# Altium PCB 小车二次制作，嘉立创版.PcbDoc
Units mm, origin at the board's own origin, x right, y up, seen from the top; angles counter-clockwise.
Board outline 100 x 80 mm, 2 copper layers (Top Layer, Bottom Layer); 13 components, 28 nets, 105 pads, 10 vias.
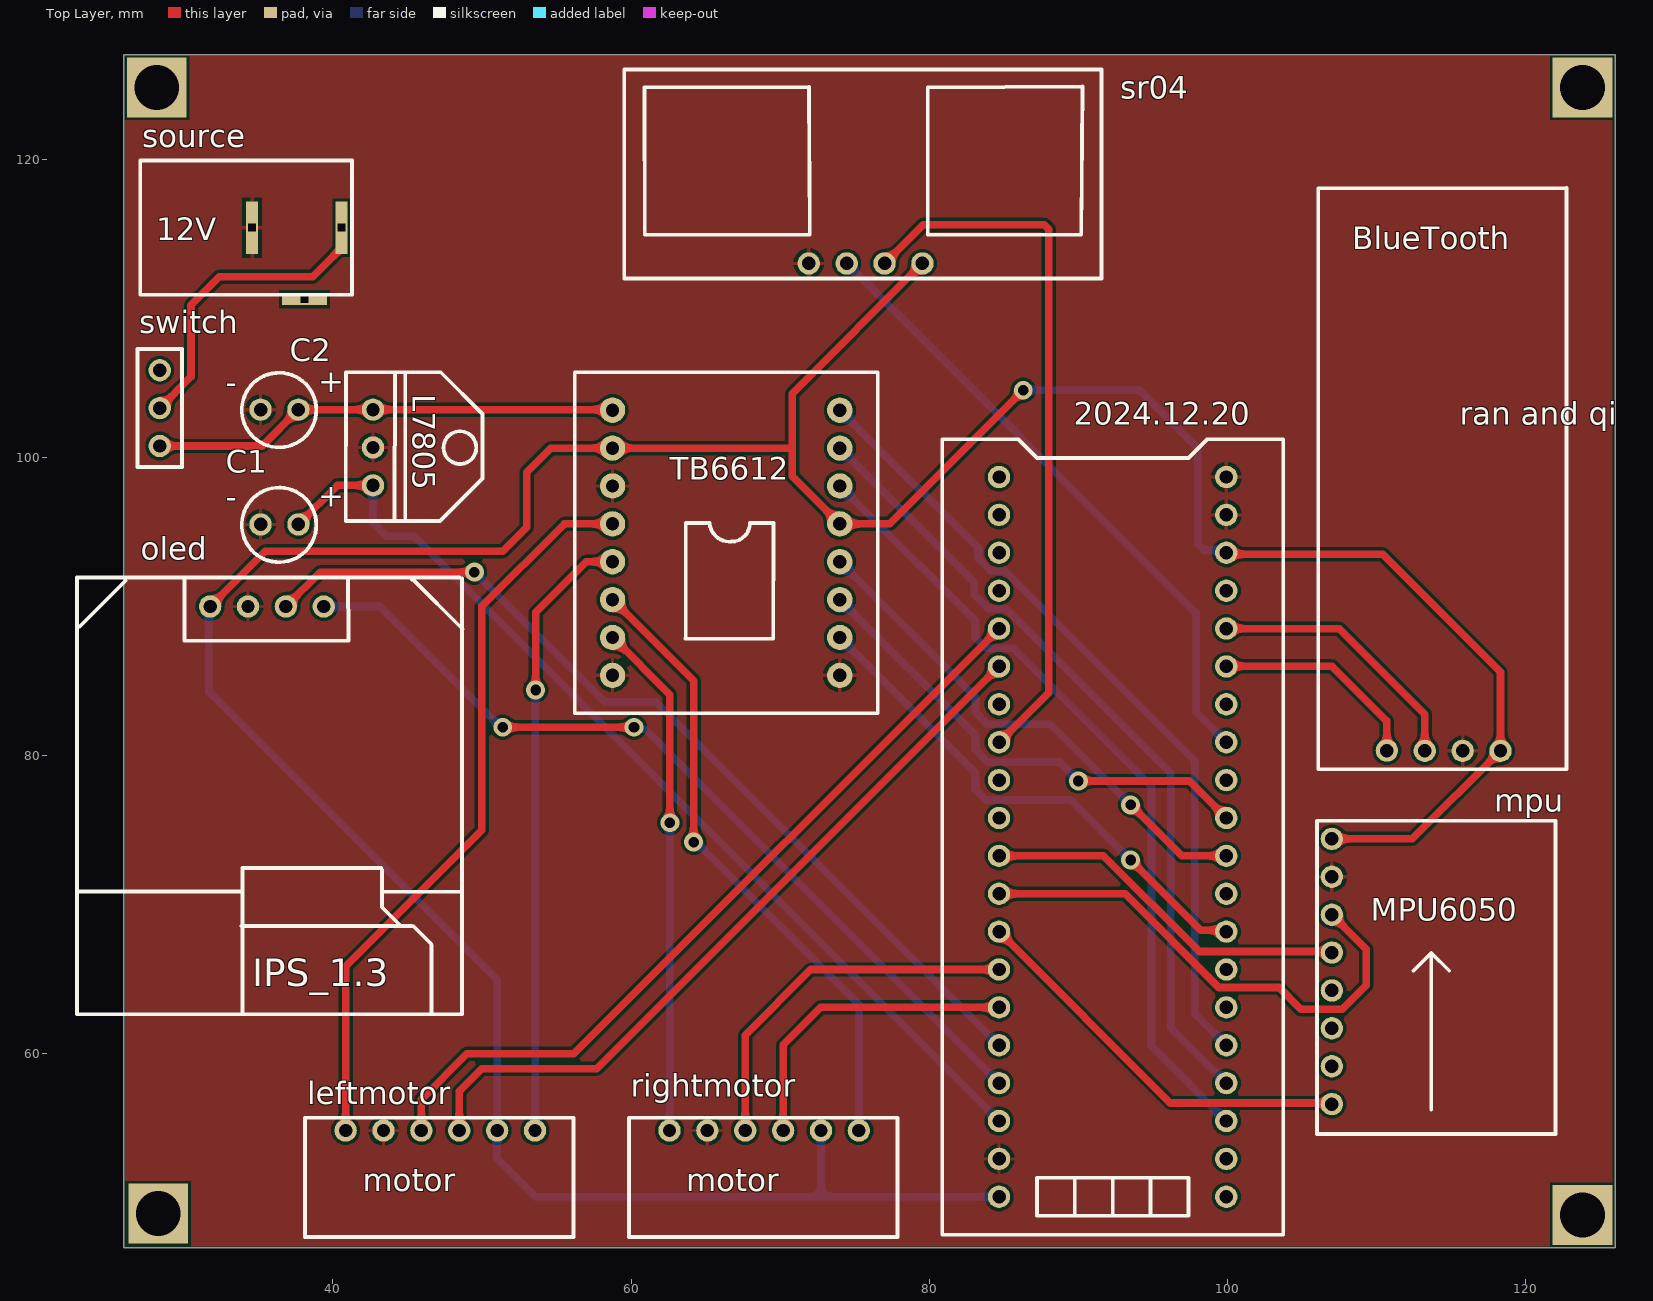
[diagram p0: Top Layer view]
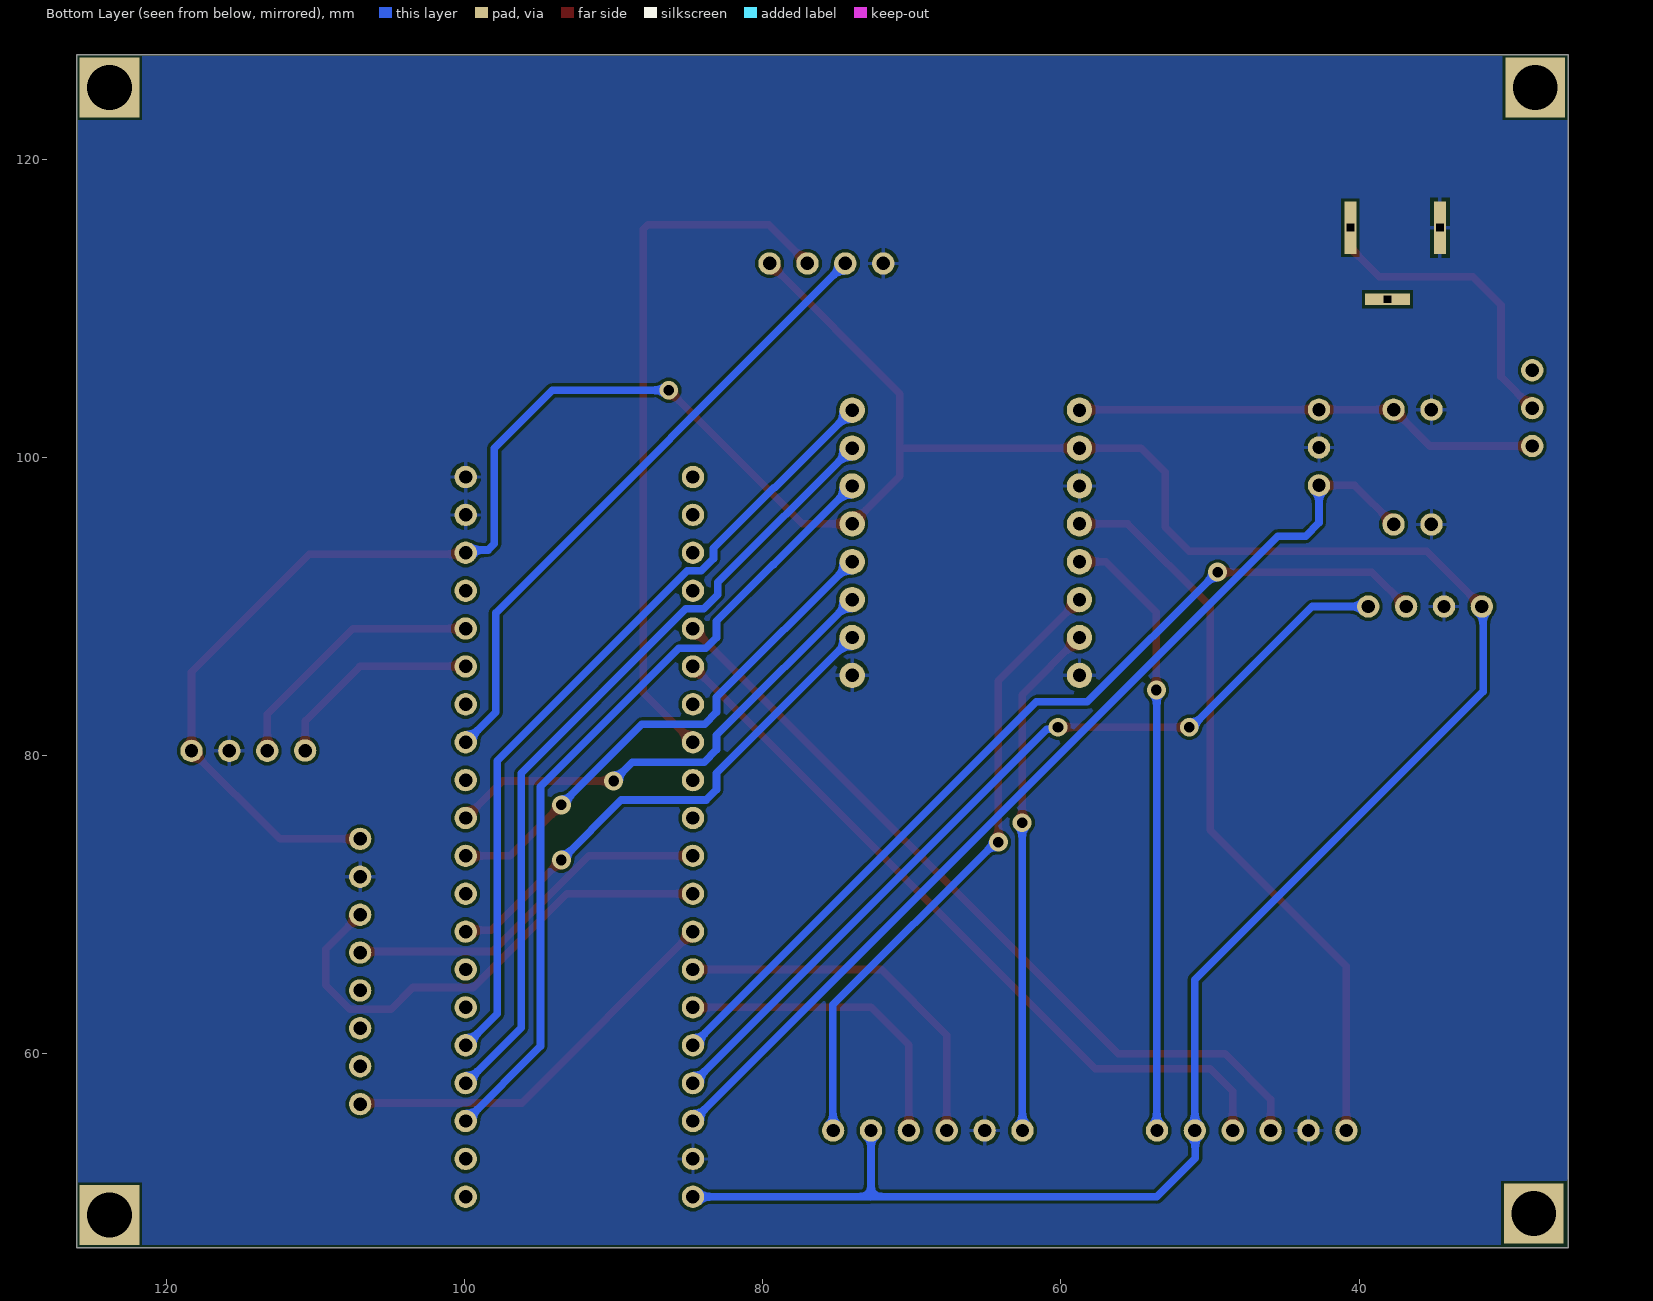
[diagram p1: Bottom Layer view, seen from below]

## Layer stack, top to bottom
Top Solder: solder mask 0.0102, Solder Resist, Dk 3.5
Top Layer: signal copper 0.0356
Dielectric 1: dielectric 0.32, FR-4, Dk 4.8
Bottom Layer: signal copper 0.0356
Bottom Solder: solder mask 0.0102, Solder Resist, Dk 3.5

## Board outline
26,47 126,47 126,127 26,127
cut-out: 0,0 0.254,0 0.254,0.254 0,0.254

## Design rules (kind name [scope] priority, off if disabled: settings)
Clearance [All] p1: gap=0.203 ignorepadtopadclearanceinfootprint=FALSE
PolygonConnect [All] p1: connectstyle=Relief reliefconductorwidth=0.254 reliefentries=4 polygonreliefangle="90 Angle" airgapwidth=0.254
RoutingVias [All] p1: holewidth=0.711 width=1.27 viastyle="Through Hole" minholewidth=0.711 minwidth=1.27 maxholewidth=0.711 maxwidth=1.27
SolderMaskExpansion [All] p1: expansion=0.102 istentingtop=FALSE
Width [All] p1: maxlimit=0.762 minlimit=0.508 preferedwidth=0.635 minimp=50.000000 maximp=50.000000 favimp=50.000000
30 further rules are at their usual default settings.

## Classes and differential pairs
component class Sheet1: left leftmotor mpu oled right rightmotor source switch tb

## Components (designator, comment, footprint, x,y, rotation, side; value= is the part's Value field where it differs from the comment)
* "T6612FNG" TB6612 89.24,70.14 r0 top
Bluetooth "HC-06" blue_tooth 114,97 r0 top
C1 "C_10uF" C_10uF 37.2,92.96 r0 top
C2 "C_10uF" C_10uF 37.2,100.66 r0 top
l7805 "L7805" L7805 41.55,100.02 r270 top
leftmotor "2.0转2.54 6pin" 2.0转2.54 45.942,52.324 r0 top
mpu "陀螺仪" 陀螺仪 113.662,64.474 r90 top
oled "1.3 OLED" "1.3 OLED" 115.07,113.65 r270 top
rightmotor "2.0转2.54 6pin" 2.0转2.54 67.659,52.324 r0 top
source "source" 12V电源 30.4,109.9 r0 top
sr04 "HC-SR04" 超声波 79.54,113 r180 top
switch "switch" switch 25.9,100.86 r270 top
U1 "STM32F103C8T6_minimum_system_board" STM32F103C8T6_minimum_system_board 92.297,78.359 r0 top

## Footprints (in the part's own frame and the unit in brackets; to place one, negate y for a bottom-side part, rotate by r counter-clockwise, add the part's x,y. Pads: shape width x height; smd on the part's side, far side on the other; paste and mask are expansions set on the pad)
"1.3 OLED" [mm]
  round 1.5 hole 0.9: 1(23.65,-83.29) 2(23.65,-80.75) 3(23.65,-78.21) 4(23.65,-75.67)
  silkscreen extent 21.7,-92.24 50.99,-66.36
2.0转2.54 [mm]
  round 1.5 hole 0.9: 1(-5.08,2.54) 2(-2.54,2.54) 3(0,2.54) 4(2.54,2.54) 5(5.08,2.54) 6(7.62,2.54)
  silkscreen extent -7.8,-4.6 10.2,3.4
12V电源 [mm]
  rect 0.8x3.5 hole 0.5 square: 1(10.2,5.5) 2(4.2,5.5)
  rect 3x0.8 hole 0.5 square: 3(7.7,0.7)
  silkscreen extent -3.3,1 10.9,10
blue_tooth [mm]
  round 1.5 hole 0.9: 1(-3.32,-16.66) 2(-0.78,-16.68) 3(1.76,-16.68) 4(4.3,-16.68)
  silkscreen extent -7.92,-17.92 8.73,21.07
C_10uF [mm]
  round 1.5 hole 0.9: 1(0.5,2.54) 2(-2.04,2.54)
  silkscreen extent -3.3,0.01 1.7,5.01
L7805 [mm]
  round 1.5 hole 0.9: 1(-3.18,1.15) 2(-0.64,1.15) 3(1.9,1.15)
  silkscreen extent -5.68,-0.68 4.29,8.49
STM32F103C8T6_minimum_system_board [mm]
  round 1.5 hole 0.9: 1(7.62,-17.78) 2(7.62,-15.24) 3(7.62,-12.7) 4(7.62,-10.16) 5(7.62,-7.62) 6(7.62,-5.08) 7(7.62,-2.54) 8(7.62,0) 9(-7.62,10.16) 10(-7.62,7.62) 11(-7.62,5.08) 12(-7.62,2.54) 13(-7.62,0) 14(-7.62,-2.54) 15(7.62,2.54) 16(7.62,5.08) 17(-7.62,-5.08) 18(-7.62,-7.62) 19(-7.62,-10.16) 20(-7.62,-12.7) 21(-7.62,-15.24) 22(-7.62,-17.78) 23(-7.62,-20.32) 24(7.62,7.62) 25(7.62,10.16) 26(-7.62,20.32) 27(-7.62,17.78) 28(-7.62,15.24) 29(-7.62,12.7) 30(7.62,-25.4) 31(7.62,-22.86) 32(7.62,-20.32) 33(-7.62,-22.86) 34(-7.62,-27.94) 34(7.62,15.24) 35(-7.62,-25.4) 35(7.62,17.78) 35(7.62,20.32) 36(7.62,-27.94) 37(7.62,12.7)
  silkscreen extent -11.43,-30.48 11.43,22.86
switch [mm]
  round 1.5 hole 0.9: 1(0.1,2.5) 2(-2.44,2.5) 3(-4.98,2.5)
  silkscreen extent -6.4,1 1.5,4
TB6612 [mm]
  round 1.7 hole 0.9: 1(-30.48,33.02) 2(-30.48,30.48) 3(-30.48,27.94) 4(-30.48,25.4) 5(-30.48,22.86) 6(-30.48,20.32) 7(-30.48,17.78) 8(-30.48,15.24) 9(-15.24,33.02) 10(-15.24,30.48) 11(-15.24,27.94) 12(-15.24,25.4) 13(-15.24,22.86) 14(-15.24,20.32) 15(-15.24,17.78) 16(-15.24,15.24)
  silkscreen extent -33.02,12.7 -12.7,35.56
超声波 [mm]
  round 1.5 hole 0.9: 1(0,0) 2(2.54,0) 3(5.08,0) 4(7.62,0)
  silkscreen extent -12,-13 20,1
陀螺仪 [mm]
  round 1.5 hole 0.9: 1(9.94,6.67) 2(7.4,6.67) 3(4.86,6.67) 4(2.32,6.67) 5(-0.22,6.67) 6(-2.76,6.67) 7(-5.3,6.67) 8(-7.84,6.67)
  silkscreen extent -9.84,-8.33 11.16,7.67

## Free pads (board coordinates)
  rect 4x4 hole 3: 1(28.2,124.8) 2(123.8,124.8) 3(28.3,49.3) 4(123.8,49.2)

## Via types
v1: diameter 1.27, hole 0.711, Top Layer to Bottom Layer, 10 vias

## Nets (pads, with @x,y where several pads share a name; then routed paths per layer and width w, separated by ;. In a path a pad name is that pad's centre, name@x,y a point inside that pad or via, vN(x,y) a via of type N, cw(c..) or ccw(c..) an arc to the next point about the centre after c; other vN are vias at no path point)
3.3V: *.2 *.12 Bluetooth.4 leftmotor.5 mpu.1 oled.1 rightmotor.5 sr04.1 U1.34 | length 230.9
  Top Layer w0.508: oled.1 35.48,93.7 51.4,93.7 53,95.3 53,99 54.62,100.62 *.2 70.78,100.62 70.8,100.6 ; sr04.1 70.8,104.26 70.8,100.6 ; v1(86.3,104.5) 77.34,95.54 *.12 70.8,98.74 70.8,100.6 ; U1.34@99.917,93.599 100.016,93.5 110.4,93.5 118.3,85.6 Bluetooth.4 112.394,74.414 mpu.1
  Bottom Layer w0.508: oled.1 31.7,89.92 31.7,84.3 51.022,64.978 leftmotor.5 51,54.842 51,53 53.581,50.419 72.739,50.419 ; rightmotor.5 72.739,50.419 ; U1.34@84.677,50.419 72.739,50.419 ; v1(86.3,104.5) 94.1,104.5 98,100.6 98,94.2 98.411,93.789 99.727,93.789 U1.34@99.917,93.599
5V: C1.1 l7805.3 U1.33 | length 67.5
  Top Layer w0.508: C1.1 40.32,98.12 l7805.3
  Bottom Layer w0.508: l7805.3@42.89,97.93 l7805.3 42.7,95.6 43.6,94.7 45.476,94.7 U1.33
12V: source.1 switch.2 | length 20.8
  Top Layer w0.508: switch.2 30.494,105.394 30.494,110.196 32.398,112.1 38.65,112.1 40.6,114.05 source.1
AIN1: *.11 U1.31 | length 54.4
  Bottom Layer w0.508: *.11 79.265,92.815 79.285,92.815 83.1,89 83.1,87.9 83.814,87.186 85.614,87.186 94.9,77.9 94.9,60.516 U1.31
AIN2: *.10 U1.32 | length 54
  Bottom Layer w0.508: *.10 83,91.62 83,90.8 83.948,89.852 85.151,89.852 96.2,78.802 96.2,61.756 U1.32
BIN1: *.13 U1.6 | length 34.7
  Top Layer w0.508: v1(93.5,76.7) 96.921,73.279 U1.6
  Bottom Layer w0.508: *.13 83.1,83.9 83.1,82.9 83.894,82.106 88.094,82.106 v1(93.5,76.7)
BIN2: *.14 U1.7 | length 32.5
  Top Layer w0.508: v1(90,78.3) 97.436,78.3 U1.7
  Bottom Layer w0.508: *.14 83.1,81.36 83.1,80.4 83.934,79.566 88.734,79.566 v1(90,78.3)
Echo: sr04.3 U1.15 | length 42.6
  Bottom Layer w0.508: sr04.3 97.9,89.56 97.9,82.916 U1.15
GND: *.3 *.8 *.16 Bluetooth.3 C1.2 C2.2 l7805.2 leftmotor.2 mpu.2 oled.2 rightmotor.2 source.2 sr04.4 U1.35
LM1: *.4 leftmotor.1 | length 50
  Top Layer w0.508: leftmotor.1 40.862,65.862 50,75 50,90 55.54,95.54 *.4
LM2: *.5 leftmotor.6 | length 41.3
  Top Layer w0.508: v1(53.6,84.4) 53.6,89.6 57,93 *.5
  Bottom Layer w0.508: leftmotor.6 53.581,54.883 53.581,84.381 v1(53.6,84.4)
MPSCL: mpu.3 U1.18 | length 34.2
  Top Layer w0.508: U1.18 93.13,70.739 99.417,64.452 103.448,64.452 104.9,63 107.7,63 109.3,64.6 109.3,67.026 mpu.3
MPSDA: mpu.4 U1.17 | length 25
  Top Layer w0.508: U1.17 91.676,73.279 98.089,66.866 106.92,66.866 mpu.4
OLED_SCL: oled.3 U1.22 | length 61.9
  Top Layer w0.508: oled.3 39.16,92.3 v1(49.5,92.3)
  Bottom Layer w0.508: v1(49.5,92.3) 49.526,92.3 58.226,83.6 61.656,83.6 U1.22
OLED_SDA: oled.4 U1.23 | length 58.5
  Top Layer w0.508: v1(51.4,81.9) v1(60.2,81.9)
  Bottom Layer w0.508: oled.4 43.15,90 51.25,81.9 v1(51.4,81.9) ; v1(60.2,81.9) 60.346,81.754 60.962,81.754 U1.23
OUT: *.1 C2.1 l7805.1 switch.1 | length 31.4
  Top Layer w0.508: switch.1 35.26,100.76 C2.1 l7805.1 58.72,103.2 *.1
PA8: leftmotor.3 U1.9 | length 53.9
  Top Layer w0.508: leftmotor.3 45.942,56.942 49,60 56.158,60 U1.9
PA9: leftmotor.4 U1.10 | length 50.6
  Top Layer w0.508: leftmotor.4 48.482,57.482 50,59 57.698,59 U1.10
PB5: mpu.8 U1.19 | length 27.2
  Top Layer w0.508: U1.19 96.17,56.706 106.92,56.706 mpu.8
  Bottom Layer w0.508: mpu.8@106.92,56.706 mpu.8
PB6: rightmotor.3 U1.20 | length 25.2
  Top Layer w0.508: rightmotor.3 67.659,61.259 72.059,65.659 U1.20
PB7: rightmotor.4 U1.21 | length 21.3
  Top Layer w0.508: rightmotor.4 70.2,54.865 70.2,60.6 72.719,63.119 U1.21
PB10: Bluetooth.1 U1.24 | length 14.3
  Top Layer w0.508: U1.24 99.938,86 107,86 110.68,82.32 Bluetooth.1
PB11: Bluetooth.2 U1.25 | length 18.1
  Top Layer w0.508: U1.25 107.481,88.519 113.22,82.78 Bluetooth.2
PWMA: *.9 U1.1 | length 53.9
  Bottom Layer w0.508: *.9 79.203,97.957 79.243,97.957 83.3,93.9 83.3,93.2 84.108,92.392 85.051,92.392 97.8,79.643 97.8,62.696 U1.1
PWMB: *.15 U1.4 | length 34.7
  Top Layer w0.508: v1(93.5,73) 98.199,68.301 99.815,68.301 U1.4
  Bottom Layer w0.508: *.15 83.1,78.82 83.1,77.7 83.774,77.026 89.474,77.026 v1(93.5,73)
RM1: *.7 rightmotor.1 | length 34.7
  Top Layer w0.508: *.7 62.6,84.08 v1(62.6,75.5)
  Bottom Layer w0.508: rightmotor.1 62.59,54.874 62.59,74.09 62.6,74.1 v1(62.6,75.5)
RM2: *.6 rightmotor.6 | length 42.6
  Top Layer w0.508: *.6 64.2,85.02 v1(64.2,74.2)
  Bottom Layer w0.508: v1(64.2,74.2) 64.379,74.2 75.29,63.29 75.29,54.874 rightmotor.6
Trig: sr04.2 U1.12 | length 48
  Top Layer w0.508: sr04.2 79.6,115.6 87.702,115.6 88,115.302 88,84.222 U1.12
  Bottom Layer w0.508: U1.12 U1.12@84.678,80.9
pads on no net: mpu.5 mpu.6 mpu.7 source.3 switch.3 U1.2 U1.3 U1.5 U1.8 U1.11 U1.13 U1.14 U1.16 U1.26 U1.27 U1.28 U1.29 U1.30 U1.36 U1.37

## Polygon pours and split planes (outlines as drawn)
GND on Top Layer "GND_L01_P001" (solid, remove dead copper, pour order 1): 26.1,126.9 125.8,126.9 125.8,47.3 125.9,47.2 125.8,47.1 26.1,47.1
GND on Bottom Layer "GND_L02_P002" (solid, remove dead copper, pour order 2): 26,126.9 125.8,126.9 125.9,126.8 125.9,47.2 26.1,47.2 26,47.3

## Silkscreen, mask and mechanical layers (free items; w line width, h text height)
Top Overlay:
  text "100 (mm)" at 70.554,135.486 h1.52
  text "95.6 (mm)" at 69.954,130.786 h1.52
  text "2024.12.20                     ran and qi                      make" at 89.7,102.2 h1.52
  text "80 (mm)" at 146.314,82.146 h1.52 r90
  text "75.854 (mm)" at 137.114,79.306 h1.52 r90
Bottom Solder:
  the board outline again, w0.254

## Text inside footprints (layer, text, board x,y; h text height)
*: Top Overlay "TB6612" at 62.594,98.494 h1.52
Bluetooth: Top Overlay "BlueTooth" at 108.354,113.954 h1.52
C1: Top Overlay "-" at 32.834,96.572 h1.52; Top Overlay "+" at 39.044,96.67 h1.52
C2: Top Overlay "-" at 32.834,104.272 h1.52; Top Overlay "+" at 39.044,104.37 h1.52
leftmotor: Top Overlay "motor" at 41.996,50.778 h1.52
mpu: Top Overlay "MPU6050" at 109.616,68.928 h1.52
oled: Top Overlay "IPS_1.3" at 34.615,64.544 h1.82
rightmotor: Top Overlay "motor" at 63.713,50.778 h1.52
source: Top Overlay "12V" at 28.154,114.554 h1.52